# EAGLE board stairwell (EAGLE 9.6.2)
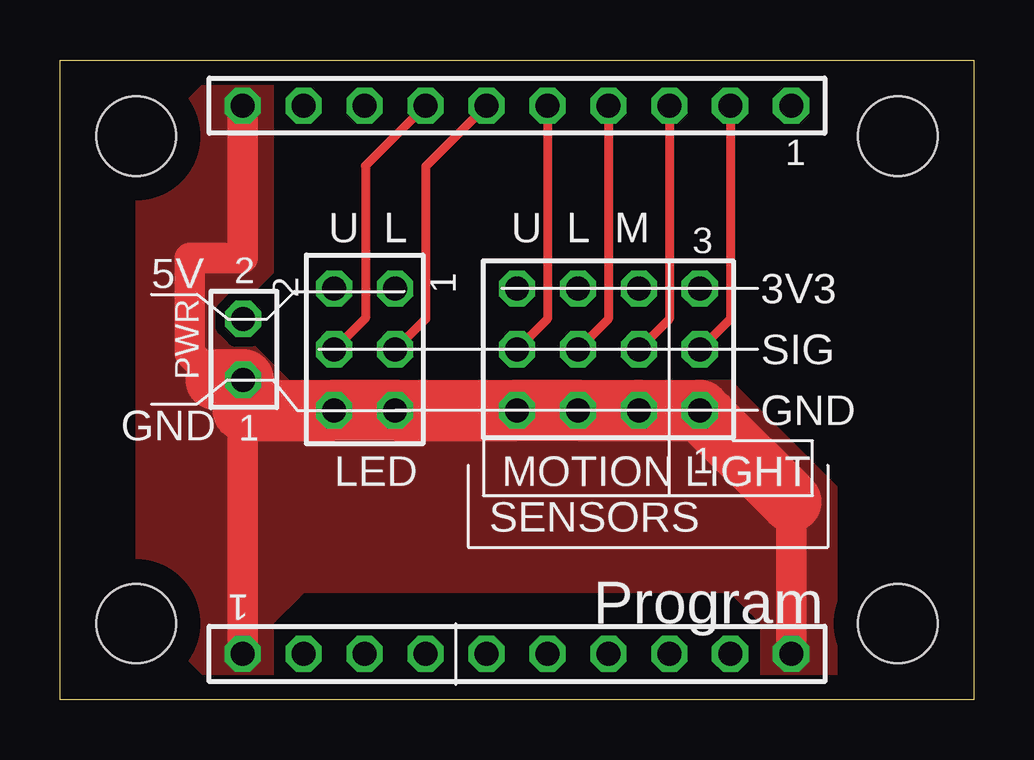
[diagram p0: board, top side]
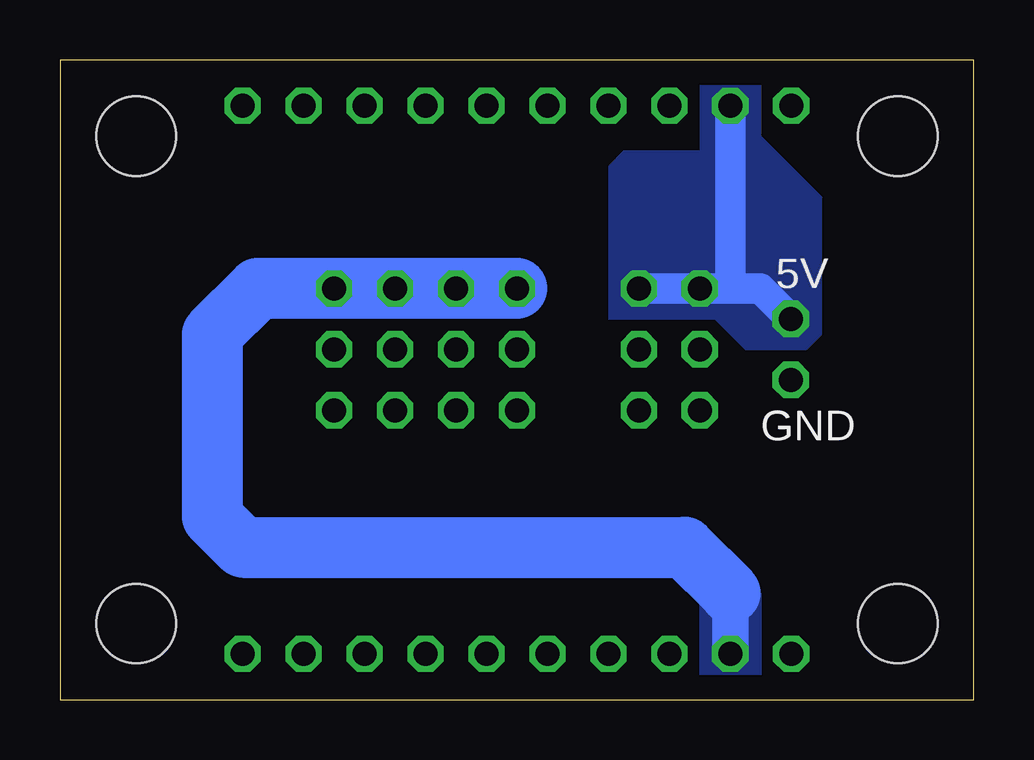
[diagram p1: board, bottom side, seen from below]

Size 38.1 x 26.67 mm. Coordinates in mm from the lower left corner, seen from the top.
Outline: 0,0 0,26.67 38.1,26.67 38.1,0 0,0
Copper layers (1*16): Top 0.035mm / dielectric 1.5mm / Bottom 0.035mm
Design rules "default": minimum track width 6mil, minimum drill 0.35mm, track to track 6mil, track to pad 6mil, pad to pad 6mil, via to via 6mil, smd to smd 6mil, copper to edge 40mil, drill to drill 6mil, minimum pad ring 10mil, minimum via ring 8mil, stop-mask expansion 4mil, vias tented up to drill 0mil, thermal gap 10mil
Net classes: 0 default: width 2.54 mm; 1 power: width 1.27 mm; 2 signal: width 0.381 mm; 3 lowpower: width 1.27 mm
Holes 3.3 mm at 3.17,23.5 3.17,3.17 34.92,3.17 34.92,23.5

## Footprints (pad centres in the part's own frame; a part is rotated, then mirrored left to right if it is on the bottom)
TSW-103-XX-G-D = drill 1 pad 1.5 octagon: 1 2.54,-1.27; 2 2.54,1.27; 3 0,-1.27; 4 0,1.27; 5 -2.54,-1.27; 6 -2.54,1.27
TSW-110-08-G-S = drill 1 pad 1.5 octagon: 1 11.43,0; 2 8.89,0; 3 6.35,0; 4 3.81,0; 5 1.27,0; 6 -1.27,0; 7 -3.81,0; 8 -6.35,0; 9 -8.89,0; 10 -11.43,0
TSW-101-XX-G-D = drill 1 pad 1.5 octagon: 1 0.02,-1.27; 2 0.02,1.27
TSW-104-07-G-T = drill 1 pad 1.5 octagon: 1 3.81,-2.54; 2 3.81,0; 3 3.81,2.54; 4 1.27,-2.54; 5 1.27,0; 6 1.27,2.54; 7 -1.27,-2.54; 8 -1.27,0; 9 -1.27,2.54; 10 -3.81,-2.54; 11 -3.81,0; 12 -3.81,2.54

## Placement (x,y rotation side)
LEDS  [TSW-103-XX-G-D]  12.7,14.61 90 top
LEFT  [TSW-110-08-G-S]  19.05,24.77 0 top
PWR  [TSW-101-XX-G-D]  7.62,14.61 0 top
RIGHT  [TSW-110-08-G-S]  19.05,1.91 180 top
SENSORS  [TSW-104-07-G-T]  22.86,14.61 0 top

## Library data of the parts
LEDS LEFT PWR RIGHT SENSORS = con-samtec

## Nets
3V3 [lowpower]: RIGHT.2 SENSORS.3 SENSORS.6 SENSORS.9 SENSORS.12
5V [power]: LEDS.1 LEDS.2 LEFT.9 PWR.2
GND [lowpower]: LEDS.5 LEDS.6 LEFT.10 PWR.1 RIGHT.1 RIGHT.10 SENSORS.1 SENSORS.4 SENSORS.7 SENSORS.10
LIGHT [signal]: LEFT.2 SENSORS.2
LOWERLED [signal]: LEDS.4 LEFT.7
LOWERMOTION [signal]: LEFT.5 SENSORS.11
MIDMOTION [signal]: LEFT.3 SENSORS.5
UPPERLED [signal]: LEDS.3 LEFT.6
UPPERMOTION [signal]: LEFT.4 SENSORS.8

## Tracks (layer width: path | path; a pad name or v marks a point on that pad's centre or on a via)
3V3
  Bottom 1.524: 10.16,4.45 RIGHT.2
  Bottom 2.54: 10.16,4.45 12.06,6.35 30.48,6.35 31.75,7.62 31.75,15.24 29.84,17.14 SENSORS.12 SENSORS.9 SENSORS.6 SENSORS.3
  pour Bottom (no thermals): 8.89,4.45 8.89,0.64 11.43,0.64 11.43,4.45
5V
  Bottom 1.27: PWR.2 8.91,17.14 10.16,17.14 | 10.16,17.14 LEDS.1 | LEFT.9 10.16,17.14
  pour Bottom (isolate 0.406, no thermals): 8.89,26.04 11.43,26.04 11.43,22.86 14.61,22.86 15.24,22.23 15.24,15.88 10.79,15.88 9.53,14.61 6.99,14.61 6.35,15.24 6.35,20.95 8.89,23.5
GND
  Top 1.27: 30.48,8.26 RIGHT.10 | 26.99,11.59 SENSORS.1 | RIGHT.1 7.62,12.06 7.62,13.34 PWR.1 | LEFT.10 7.62,18.41 5.4,18.41 5.4,14.45 6.51,13.34
  Top 2.032: 26.99,11.59 26.99,11.75
  Top 2.54: SENSORS.1 SENSORS.4 SENSORS.7 SENSORS.10 LEDS.5 LEDS.6 7.62,12.06 | 30.48,8.26 26.99,11.75 | PWR.1 6.51,13.34
  pour Top (isolate 0.406, no thermals): 7.62,15.24 9.53,13.34 27.94,13.34 32.38,8.89 32.38,0.64 29.21,0.64 29.21,3.17 27.94,4.45 10.16,4.45 8.89,3.17 8.89,0.64 6.35,0.64 3.17,3.81 3.17,22.86 6.35,26.04 8.89,26.04 8.89,17.78 7.62,16.51 6.99,16.51 6.99,15.24
LIGHT
  Top 0.381: SENSORS.2 27.94,15.88 LEFT.2
LOWERLED
  Top 0.381: LEDS.4 12.73,15.91 12.73,22.26 LEFT.7
LOWERMOTION
  Top 0.381: SENSORS.11 20.32,15.88 LEFT.5
MIDMOTION
  Top 0.381: SENSORS.5 25.4,15.88 LEFT.3
UPPERLED
  Top 0.381: LEDS.3 15.24,15.88 15.24,22.23 LEFT.6
UPPERMOTION
  Top 0.381: SENSORS.8 22.86,15.88 LEFT.4

## Text on the board
tNames: U L | U L M | 5V | 3V3 | SIG | GND | GND | LED | MOTION | LIGHT | Program
bNames: 5V | GND